# Altium PCB PUMP_MODULE_20230110.PcbDoc (part 4 of 6)
Units mm, origin at the board's own origin, x right, y up, seen from the top; angles counter-clockwise.
Board outline 260.15 x 142.01 mm, 4 copper layers (Top Layer, Mid-Layer 1, Mid-Layer 2, Bottom Layer); 422 components, 240 nets, 1746 pads, 416 vias.
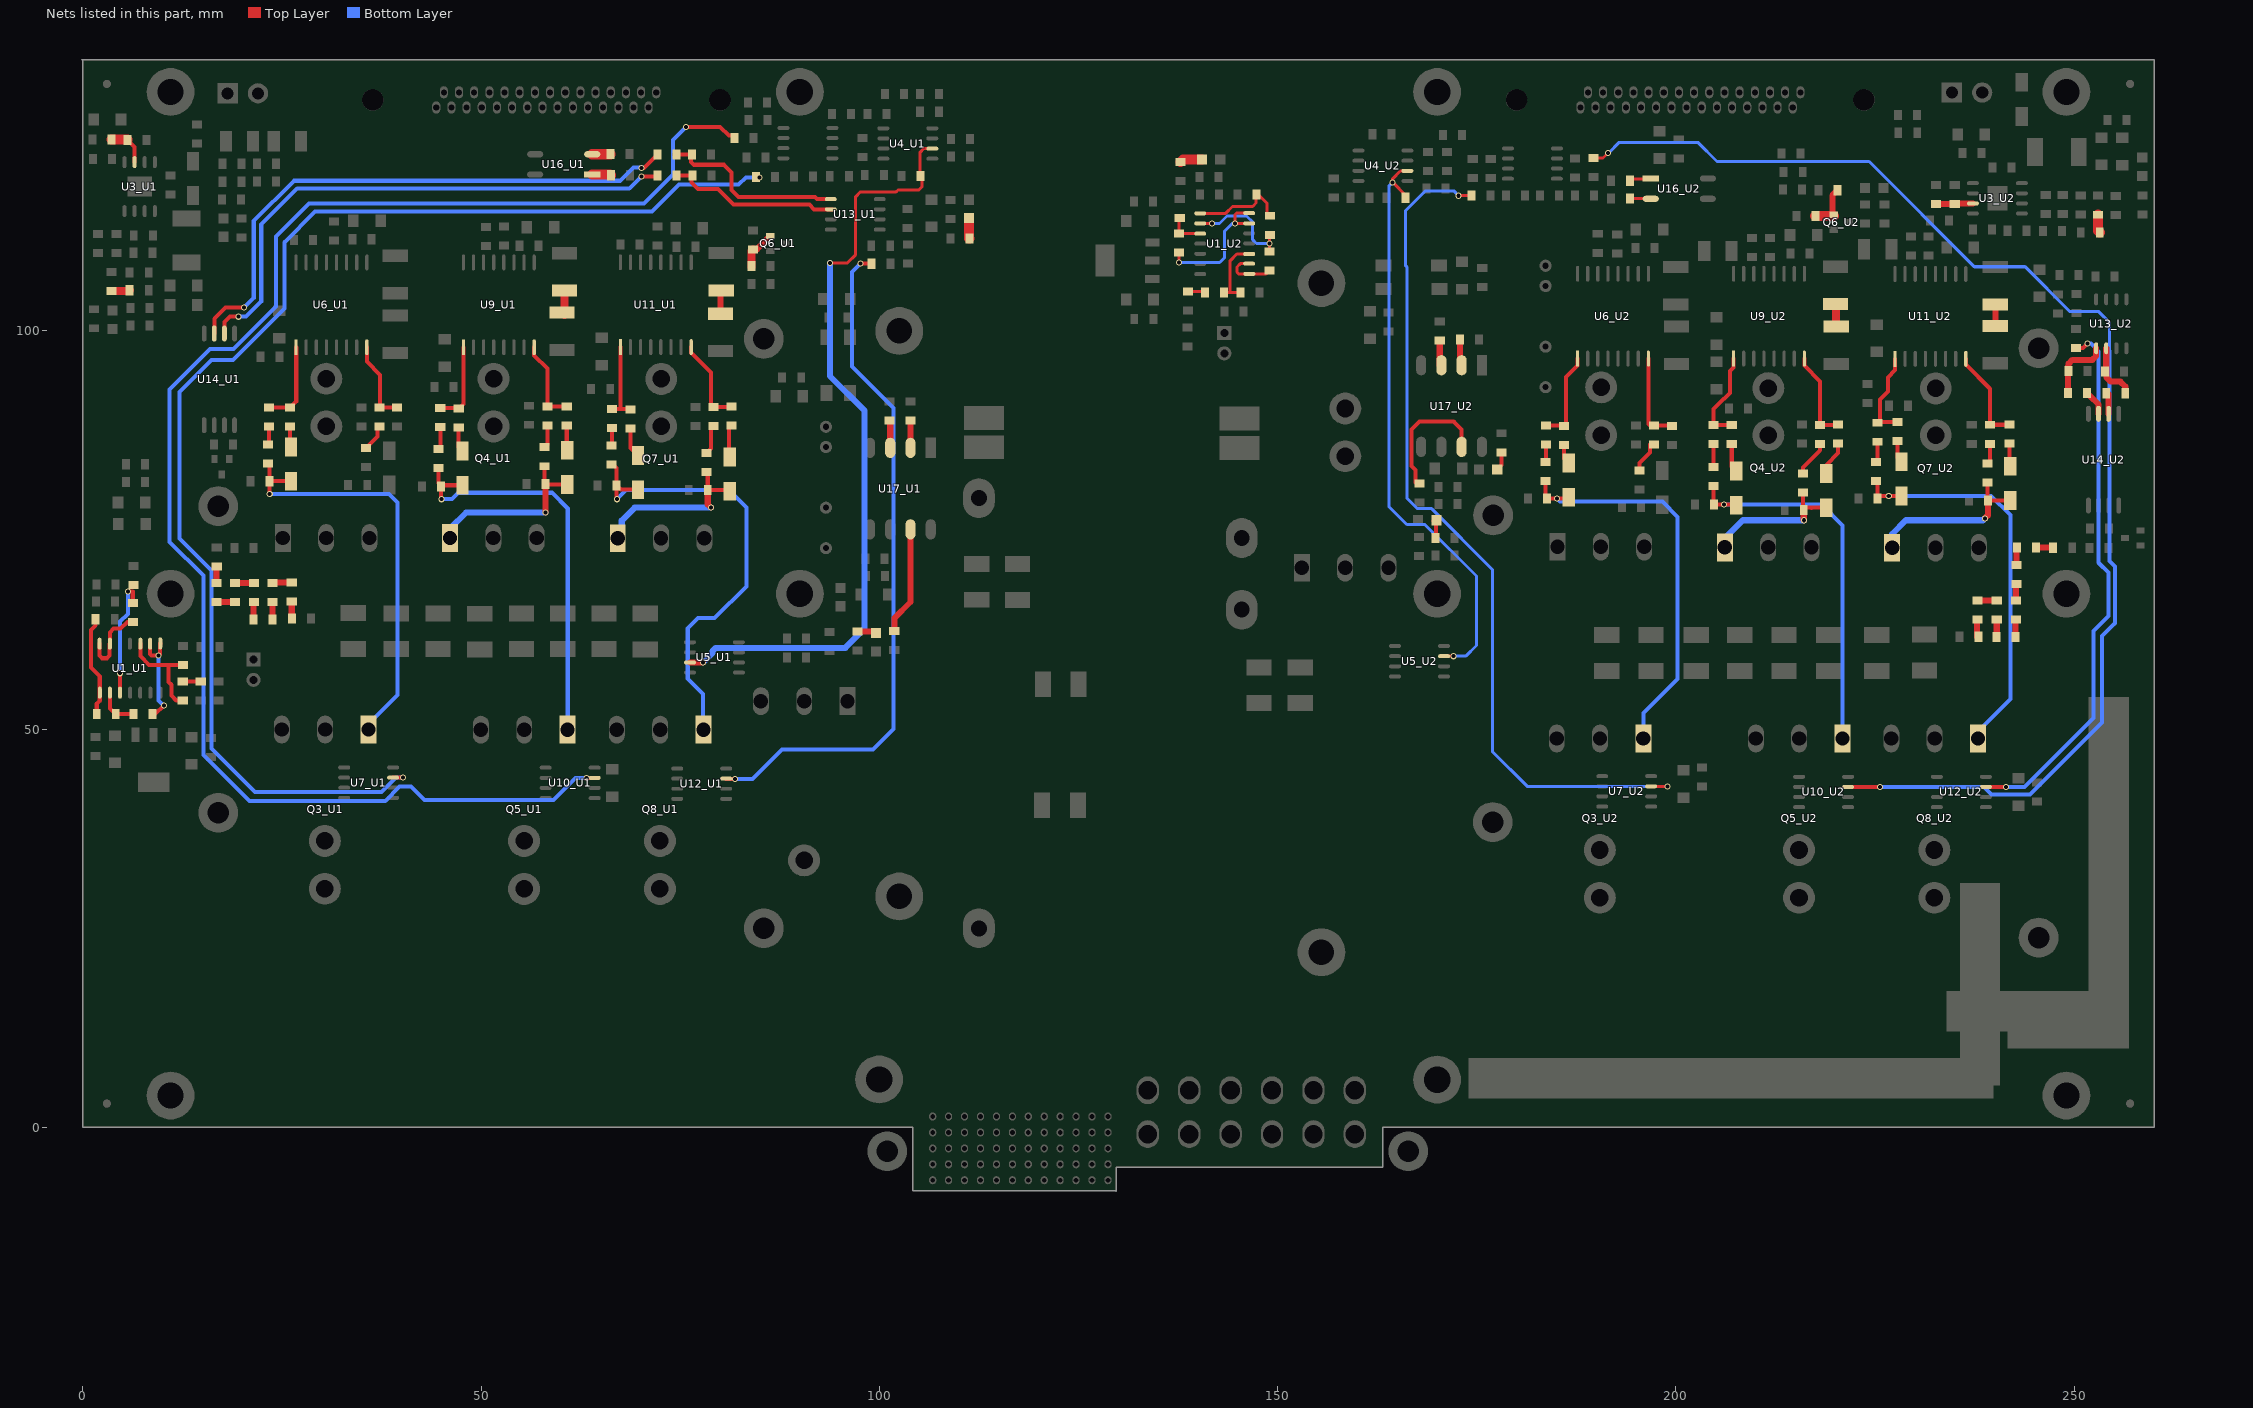
[diagram p6: the nets of this part, all layers, seen from the top]

## Via types
v1: diameter 0.762, hole 0.508, Top Layer to Bottom Layer, 208 vias
v2: diameter 2.032, hole 1.27, Top Layer to Bottom Layer, 78 vias
v3: diameter 1.27, hole 0.762, Top Layer to Bottom Layer, 61 vias
v4: diameter 1.524, hole 1.016, Top Layer to Bottom Layer, 53 vias
v5: diameter 1.27, hole 0.711, Top Layer to Bottom Layer, 16 vias

## Nets (pads, with @x,y where several pads share a name; then routed paths per layer and width w, separated by ;. In a path a pad name is that pad's centre, name@x,y a point inside that pad or via, vN(x,y) a via of type N, cw(c..) or ccw(c..) an arc to the next point about the centre after c; other vN are vias at no path point) (continued)
NetD8_U2_2: D8_U2.2 R34_U2.1 | length 2.4
  Top Layer w0.508: D8_U2.2@177.571,82.601 178.105,83.134 R34_U2.1@178.105,84.76
NetD9_U1_1: D9_U1.1 Q3_U1.1 R36_U1.2 R37_U1.2 | length 53.1
  Top Layer w0.508: R36_U1.2@23.241,83.363 23.444,83.16 R37_U1.2@23.444,81.128 ; v1(23.47,79.502) 23.444,79.527 R37_U1.2@23.444,81.128 ; D9_U1.1@26.137,81.128 R37_U1.2@23.444,81.128
  Bottom Layer w0.508: v1(23.47,79.502) 38.456,79.502 39.497,78.461 39.497,54.28 35.88,50.663 Q3_U1.1@35.88,50
NetD9_U1_2: D9_U1.2 R32_U1.2 | length 2.6
  Top Layer w0.508: R32_U1.2@26.035,87.986 26.035,85.529 D9_U1.2@26.137,85.428
NetD9_U2_1: D9_U2.1 Q3_U2.1 R36_U2.2 R37_U2.2 | length 50.8
  Top Layer w0.508: R36_U2.2@183.617,81.153 183.617,79.121 R37_U2.2@183.794,78.943 v1(185.077,78.943) 186.36,78.943 D9_U2.1@186.538,79.121
  Bottom Layer w0.508: v1(185.077,78.943) 185.458,78.562 198.298,78.562 200.228,76.632 200.228,56.312 195.921,52.005 Q3_U2.1@195.921,48.83
NetD9_U2_2: D9_U2.2 R32_U2.2 | length 2.5
  Top Layer w0.508: R32_U2.2@185.953,85.674 185.953,84.005 D9_U2.2@186.538,83.421
NetD10_U1_1: D10_U1.1 Q4_U1.1 R42_U1.2 R47_U1.2 | length 22.6
  Top Layer w0.508: R42_U1.2@57.963,83.007 57.963,80.899 R47_U1.2@58.064,80.797 58.141,80.721 D10_U1.1@60.833,80.721
  Top Layer w0.762: v1(58.064,77.216) 58.064,78.461 58.09,78.486 58.064,78.511 R47_U1.2@58.064,80.797
  Bottom Layer w0.762: Q4_U1.1@46.12,74 46.12,75.203 48.108,77.191 58.039,77.191 v1(58.064,77.216)
NetD10_U1_2: D10_U1.2 R39_U1.2 | length 3.1
  Top Layer w0.508: R39_U1.2@60.757,88.113 60.757,85.097 D10_U1.2@60.833,85.021
NetD10_U2_1: D10_U2.1 Q4_U2.1 R42_U2.2 R47_U2.2 | length 18.5
  Top Layer w0.508: R42_U2.2@215.951,79.705 215.951,77.622 R47_U2.2@216.052,77.521 216.332,77.8 217.018,77.8 ; 217.041,77.776 217.018,77.8 ; D10_U2.1@218.897,77.8 217.018,77.8
  Top Layer w0.762: R47_U2.2@216.052,77.521 216.052,76.251 v1(216.078,76.225)
  Bottom Layer w0.762: Q4_U2.1@206.146,72.822 206.146,73.965 208.407,76.225 v1(216.078,76.225)
NetD10_U2_2: D10_U2.2 R39_U2.2 | length 4.4
  Top Layer w0.508: D10_U2.2@218.897,82.1 218.897,83.185 220.37,84.658 R39_U2.2@220.37,85.852
NetD11_U1_2: D11_U1.2 D12_U1.1 | length 2.9
  Top Layer w1.016: D12_U1.1@60.477,101.981 D11_U1.2@60.477,104.902
NetD11_U2_2: D11_U2.2 D12_U2.1 | length 2.3
  Top Layer w1.016: D12_U2.1@220.116,100.533 D11_U2.2@220.116,102.819
NetD13_U1_2: D13_U1.2 R46_U1.2 | length 2.4
  Top Layer w0.762: R46_U1.2@97.282,62.255 99.416,62.255 D13_U1.2@99.593,62.078
NetD13_U2_2: D13_U2.2 R46_U2.2 | length 2.4
  Top Layer w0.508: D13_U2.2@169.748,76.124 169.596,76.124 169.875,75.844 R46_U2.2@169.875,73.965
NetD14_U1_1: D14_U1.1 Q5_U1.1 R53_U1.2 R54_U1.2 | length 51.5
  Top Layer w0.508: R53_U1.2@44.679,82.779 44.679,80.874 45.085,80.467 45.237,80.62 D14_U1.1@47.676,80.62 ; R54_U1.2@44.958,80.467 44.958,78.918 v1(45.009,78.867)
  Bottom Layer w0.508: v1(45.009,78.867) 46.33,78.867 47.142,79.68 58.928,79.68 60.884,77.724 60.884,50.004 Q5_U1.1@60.88,50
NetD14_U1_2: D14_U1.2 R49_U1.2 | length 3.1
  Top Layer w0.508: R49_U1.2@47.193,87.859 47.193,85.402 D14_U1.2@47.676,84.92
NetD14_U2_1: D14_U2.1 Q5_U2.1 R53_U2.2 R54_U2.2 | length 47.9
  Top Layer w0.508: R53_U2.2@204.724,80.518 204.724,78.232 R54_U2.2@204.775,78.181 v1(206.045,78.181) 207.493,78.181 D14_U2.1@207.569,78.105
  Bottom Layer w0.508: v1(206.045,78.181) 218.313,78.181 220.921,75.573 Q5_U2.1@220.921,48.83
NetD14_U2_2: D14_U2.2 R49_U2.2 | length 3.6
  Top Layer w0.508: R49_U2.2@207.01,85.801 207.01,82.964 D14_U2.2@207.569,82.405
NetD15_U1_1: D15_U1.1 Q7_U1.1 R61_U1.2 R62_U1.2 | length 21.9
  Top Layer w0.508: R61_U1.2@78.283,82.296 78.461,82.118 R62_U1.2@78.461,80.035 81.026,80.035 D15_U1.1@81.204,79.858
  Top Layer w0.762: R62_U1.2@78.461,80.035 78.461,78.207 78.867,77.8 v1(78.892,77.8)
  Bottom Layer w0.762: Q7_U1.1@67.12,74 67.666,74.546 67.666,76.175 69.291,77.8 v1(78.892,77.8)
NetD15_U1_2: D15_U1.2 R59_U1.2 | length 4
  Top Layer w0.508: R59_U1.2@81.128,88.113 81.128,84.234 D15_U1.2@81.204,84.158
NetD15_U2_1: D15_U2.1 Q7_U2.1 R61_U2.2 R62_U2.2 | length 21.7
  Top Layer w0.508: R61_U2.2@239.116,80.975 239.116,78.689 239.141,78.715 D15_U2.1@241.96,78.715
  Top Layer w0.762: v1(238.785,76.454) 239.166,76.835 R62_U2.2@239.166,78.689
  Bottom Layer w0.762: Q7_U2.1@227.152,72.771 227.152,74.498 228.879,76.225 238.557,76.225 v1(238.785,76.454)
NetD15_U2_2: D15_U2.2 R59_U2.2 | length 2.9
  Top Layer w0.508: R59_U2.2@241.884,85.852 241.884,83.091 D15_U2.2@241.96,83.015
NetD16_U1_2: D16_U1.2 D17_U1.1 | length 2.8
  Top Layer w0.762: D17_U1.1@80.061,102.159 D16_U1.2@80.061,105.004
NetD16_U2_2: D16_U2.2 D17_U2.1 | length 2.7
  Top Layer w0.762: D17_U2.1@240.106,100.635 D16_U2.2@240.106,103.327
NetD18_U1_1: D18_U1.1 Q8_U1.1 R67_U1.2 R68_U1.2 | length 58.1
  Top Layer w0.508: R67_U1.2@66.396,83.236 66.573,83.236 67.031,82.779 R68_U1.2@67.031,80.569 ; v1(67.056,78.867) 67.031,78.892 R68_U1.2@67.031,80.569 ; D18_U1.1@69.698,80.061 67.539,80.061 R68_U1.2@67.031,80.569
  Bottom Layer w0.508: v1(67.056,78.867) 68.199,80.01 81.102,80.01 83.312,77.8 83.312,67.92 79.324,63.932 77.241,63.932 75.946,62.636 75.946,56.363 77.88,54.429 Q8_U1.1@77.88,50
NetD18_U1_2: D18_U1.2 R64_U1.2 | length 3.8
  Top Layer w0.508: R64_U1.2@68.783,87.757 68.783,85.275 D18_U1.2@69.698,84.361
NetD18_U2_1: D18_U2.1 Q8_U2.1 R67_U2.2 R68_U2.2 | length 51.4
  Top Layer w0.508: R67_U2.2@225.12,81.153 225.323,80.95 R68_U2.2@225.323,78.943 225.654,79.273 v1(226.72,79.273) D18_U2.1@228.321,79.273
  Bottom Layer w0.508: v1(226.72,79.273) 239.573,79.273 241.986,76.86 241.986,53.797 237.921,49.733 Q8_U2.1@237.921,48.83
NetD18_U2_2: D18_U2.2 R64_U2.2 | length 2.8
  Top Layer w0.508: R64_U2.2@227.813,86.182 227.813,84.081 D18_U2.2@228.321,83.573
NetD19_U1_2: D19_U1.2 R71_U1.2 | length 2.6
  Top Layer w1.27: D19_U1.2@111.277,114.148 111.277,111.608 R71_U1.2@111.303,111.582
NetD19_U2_2: D19_U2.2 R71_U2.2 | length 2.8
  Top Layer w1.27: R71_U2.2@137.82,121.183 138.151,121.514 D19_U2.2@140.487,121.514
NetQ6_U1_1: Q6_U1.1 R55_U1.1 R58_U1.2 | length 5.1
  Top Layer w0.762: R55_U1.1@84.15,110.236 84.607,110.236 86.081,111.709 Q6_U1.1@86.309,111.709
  Top Layer w1.016: R58_U1.2@83.972,108.001 83.972,110.058 R55_U1.1@84.15,110.236
NetQ6_U2_1: Q6_U2.1 R55_U2.1 R58_U2.2 | length 5.8
  Top Layer w0.762: Q6_U2.1@219.812,114.579 219.634,114.757 219.634,117.018 R55_U2.1@220.269,117.653
  Top Layer w1.27: R58_U2.2@217.449,114.427 R58_U2.2@217.5,114.427 218.948,114.427 Q6_U2.1@219.812,114.427
NetR1_U1_1: R1_U1.1 R5_U1.1 U1_U1.1 | length 12
  Top Layer w0.508: 1.6,63.043 1.016,62.459 1.016,57.734 2.134,56.617 U1_U1.1@2.134,54.585 2.134,53.569 1.753,53.188 R1_U1.1@1.753,51.892
NetR1_U1_2: R1_U1.2 R2_U1.1 U1_U1.2 | length 5.3
  Top Layer w0.508: U1_U1.2@3.404,54.585 3.404,52.578 4.14,51.841 4.191,51.892 R2_U1.1@6.375,51.892
NetR1_U2_1: R1_U2.1 R5_U2.1 U1_U2.1 | length 12.1
  Top Layer w0.381: U1_U2.1@140.284,114.757 143.485,114.757 144.348,115.621 146.863,115.621 147.295,116.053 147.295,117.069 R5_U2.1@147.345,117.119 147.574,117.119 148.641,116.053 148.641,114.859 R1_U2.1@149.047,114.452
NetR1_U2_2: R1_U2.2 R2_U2.1 U1_U2.2 | length 13.9
  Top Layer w0.381: U1_U2.2@140.284,113.487 v1(141.757,113.487) ; R2_U2.1@148.996,109.982 v1(148.996,110.973) 148.996,112.014 R1_U2.2@149.047,112.065
  Bottom Layer w0.381: v1(141.757,113.487) 142.697,113.487 143.637,114.427 146.101,114.427 146.863,113.665 146.863,111.455 147.345,110.973 v1(148.996,110.973)
NetR2_U1_2: R2_U1.2 U1_U1.8 U1_U1.9 | length 12.5
  Top Layer w0.508: U1_U1.9@8.458,60.731 8.458,59.436 8.636,59.258 v1(9.5,59.258) 9.703,59.461 9.703,60.731 U1_U1.8@9.728,60.757 ; R2_U1.2@8.763,51.892 9.093,51.892 v1(10.185,52.984)
  Bottom Layer w0.508: v1(9.5,59.258) 9.5,53.619 v1@10.16,52.959
NetR2_U2_2: R2_U2.2 U1_U2.8 U1_U2.9 | length 6.7
  Top Layer w0.381: U1_U2.9@146.431,108.433 145.313,108.433 144.907,108.026 144.907,107.366 145.161,107.112 146.406,107.112 U1_U2.8@146.456,107.163 148.565,107.163 R2_U2.2@148.996,107.594
NetR3_U1_2: R3_U1.2 R7_U1.1 U1_U1.10 | length 13
  Top Layer w0.508: U1_U1.10@7.239,60.731 7.239,59.157 8.331,58.064 10.77,58.064 ; R7_U1.1@12.548,53.619 11.735,53.619 11.125,54.229 11.125,55.575 10.77,55.931 10.77,58.064 ; R3_U1.2@12.573,58.064 10.77,58.064
NetR3_U2_2: R3_U2.2 R7_U2.1 U1_U2.10 | length 8.8
  Top Layer w0.381: R7_U2.1@143.256,104.8 144.018,104.8 ; R3_U2.2@145.339,104.8 144.018,104.8 ; U1_U2.10@146.431,109.652 144.882,109.652 144.043,108.814 144.043,104.826 144.018,104.8
NetR6_U1_1: R6_U1.1 R12_U1.1 U1_U1.3 | length 15.2
  Top Layer w0.508: U1_U1.3@4.674,54.585 4.674,56.998 v1(4.699,57.023) ; v1(5.664,67.285) 6.274,67.285 6.274,65.913 R6_U1.1@6.325,65.862
  Bottom Layer w0.508: v1(4.699,57.023) 4.699,63.5 5.664,64.465 v1(5.664,67.285)
NetR6_U1_2: R6_U1.2 U1_U1.13 U1_U1.14 | length 9.4
  Top Layer w0.508: U1_U1.14@2.108,60.731 2.108,59.233 2.438,58.903 3.048,58.903 3.378,59.233 3.378,60.706 U1_U1.13@3.404,60.731 3.404,62.154 3.861,62.611 4.75,62.611 5.613,63.475 R6_U1.2@6.325,63.475
NetR6_U2_1: R6_U2.1 R12_U2.1 U1_U2.3 | length 4.7
  Top Layer w0.381: R12_U2.1@137.719,114.173 137.617,114.071 R6_U2.1@137.617,112.217 U1_U2.3@140.284,112.217
NetR6_U2_2: R6_U2.2 U1_U2.13 U1_U2.14 | length 17
  Top Layer w0.381: v1(137.617,108.585) R6_U2.2@137.617,109.83 ; U1_U2.13@146.431,113.487 v1(144.653,113.487) 144.653,114.605 144.831,114.783 U1_U2.14@146.431,114.783
  Bottom Layer w0.381: v1(137.617,108.585) 142.723,108.585 143.358,109.22 143.358,112.547 144.297,113.487 v1(144.653,113.487)
NetR7_U1_2: R7_U1.2 R10_U1.2 | length 2.3
  Top Layer w0.508: R7_U1.2@12.548,56.007 R10_U1.2@14.808,56.007
NetR7_U2_2: R7_U2.2 R10_U2.2 | length 2.2
  Top Layer w0.381: R10_U2.2@138.735,104.927 140.741,104.927 R7_U2.2@140.868,104.8
NetR17_U1_2: R17_U1.2 R24_U1.1 U3_U1.3 | length 5.2
  Top Layer w0.508: R17_U1.2@5.613,123.977 6.502,123.088 U3_U1.3@6.502,121.183
  Top Layer w1.27: R24_U1.1@3.607,124.003 5.588,124.003 R17_U1.2@5.613,123.977
NetR17_U2_2: R17_U2.2 R24_U2.1 U3_U2.3 | length 4.4
  Top Layer w0.762: R24_U2.1@232.664,115.926 234.975,115.926 R17_U2.2@235.001,115.951 ; R17_U2.2@235.255,116.002 U3_U2.3@237.287,116.002
NetR19_U1_2: R19_U1.2 R20_U1.1 | length 2.3
  Top Layer w1.016: R19_U1.2@3.607,105.004 5.791,105.004 R20_U1.1@5.893,105.105
NetR19_U2_2: R19_U2.2 R20_U2.1 | length 2.3
  Top Layer w1.27: R20_U2.1@253.009,114.579 253.009,112.547 R19_U2.2@253.213,112.344
NetR23_U1_1: R23_U1.1 R26_U1.1 U6_U1.8 | length 10
  Top Layer w0.508: U6_U1.8@35.662,97.942 35.662,96.139 37.313,94.488 37.313,90.551 37.465,90.399 R23_U1.1@39.218,90.399
NetR23_U2_1: R23_U2.1 R26_U2.1 U6_U2.8 | length 10.8
  Top Layer w0.508: U6_U2.8@196.545,96.52 196.545,88.29 196.723,88.113 R23_U2.1@199.009,88.113
NetR26_U1_2: R26_U1.2 R27_U1.1 | length 3.3
  Top Layer w0.508: R27_U1.1@35.56,85.293 36.982,86.716 R26_U1.2@36.982,87.986
NetR26_U2_2: R26_U2.2 R27_U2.1 | length 3.8
  Top Layer w0.508: R27_U2.1@195.453,82.474 195.453,83.439 196.723,84.709 R26_U2.2@196.723,85.725
NetR29_U1_2: R29_U1.2 U4_U1.6 U5_U1.7 | length 98
  Top Layer w0.381: v1(93.802,108.534) 95.987,108.534 97.028,109.576 97.028,116.84 97.638,117.45 102.108,117.45 102.337,117.678 ; 102.972,117.678 102.337,117.678 ; R29_U1.2@105.156,119.456 105.131,119.482 105.131,122.428 105.588,122.885 U4_U1.6@106.655,122.885 ; R29_U1.2@105.359,119.507 105.359,118.085 104.953,117.678 102.337,117.678
  Top Layer w0.762: U5_U1.7@76.225,58.369 v1(77.876,58.369)
  Bottom Layer w0.762: v1(77.876,58.369) 79.045,59.538 79.045,59.792 79.451,60.198 95.733,60.198 98.12,62.586 98.12,90.018 93.802,94.336 v1(93.802,108.534)
NetR29_U2_2: R29_U2.2 U4_U2.6 U5_U2.7 | length 74.2
  Top Layer w0.381: R29_U2.2@166.065,116.713 166.141,116.789 166.141,116.942 v1(164.44,118.643) 164.44,119.101 165.43,120.091 U4_U2.6@166.294,120.091 ; U5_U2.7@170.891,59.157 v1(172.06,59.157)
  Bottom Layer w0.381: v1(164.44,118.643) 163.957,118.161 163.957,77.953 166.218,75.692 168.478,75.692 174.955,69.215 174.955,60.503 173.609,59.157 v1(172.06,59.157)
NetR32_U1_1: R32_U1.1 R35_U1.1 U6_U1.1 | length 10.6
  Top Layer w0.508: R35_U1.1@23.368,90.373 R32_U1.1@26.035,90.373 26.797,91.135 26.797,97.917 U6_U1.1@26.772,97.942
NetR32_U2_1: R32_U2.1 R35_U2.1 U6_U2.1 | length 11.3
  Top Layer w0.508: R35_U2.1@183.693,88.138 185.877,88.138 186.207,88.468 186.207,94.209 187.655,95.656 U6_U2.1@187.655,96.52
NetR35_U1_2: R35_U1.2 R36_U1.1 | length 2.3
  Top Layer w0.508: R36_U1.1@23.241,85.75 23.368,85.877 R35_U1.2@23.368,87.986
NetR35_U2_2: R35_U2.2 R36_U2.1 | length 2.2
  Top Layer w0.508: R36_U2.1@183.617,83.541 183.693,83.617 R35_U2.2@183.693,85.75
NetR38_U1_2: R38_U1.2 U17_U1.2 | length 3.4
  Top Layer w0.762: U17_U1.2@103.911,85.319 R38_U1.2@103.911,88.748
NetR38_U2_2: R38_U2.2 U17_U2.2 | length 3.1
  Top Layer w0.762: U17_U2.2@172.898,95.682 172.898,98.755 R38_U2.2@172.923,98.781
NetR39_U1_1: R39_U1.1 R41_U1.1 U9_U1.8 | length 10.5
  Top Layer w0.508: U9_U1.8@56.667,97.942 56.667,96.926 58.318,95.275 R41_U1.1@58.318,90.526 60.731,90.526 R39_U1.1@60.757,90.5
NetR39_U2_1: R39_U2.1 R41_U2.1 U9_U2.8 | length 11.4
  Top Layer w0.508: U9_U2.8@216.129,96.52 216.129,95.631 218.11,93.65 R41_U2.1@218.11,88.189 220.32,88.189 R39_U2.1@220.37,88.24
NetR40_U1_1: R40_U1.1 U17_U1.7 | length 13.6
  Top Layer w0.762: R40_U1.1@101.879,62.332 101.879,63.932 103.911,65.964 U17_U1.7@103.911,75.082
NetR40_U2_1: R40_U2.1 U17_U2.7 | length 16.6
  Top Layer w0.508: R40_U2.1@167.335,80.95 167.335,82.525 166.827,83.033 166.827,87.605 167.818,88.595 172.11,88.595 173.101,87.605 173.101,85.649 172.898,85.446 U17_U2.7@173.177,85.166
NetR41_U1_2: R41_U1.2 R42_U1.1 | length 2.9
  Top Layer w0.508: R42_U1.1@57.963,85.395 58.318,85.75 R41_U1.2@58.318,88.138
NetR41_U2_2: R41_U2.2 R42_U2.1 | length 4.6
  Top Layer w0.508: R42_U2.1@215.951,82.093 215.951,82.855 218.11,85.014 R41_U2.2@218.11,85.801
NetR44_U1_2: R44_U1.2 U7_U1.7 | length 163.6
  Top Layer w0.508: U7_U1.7@38.964,43.917 40.183,43.917 v1(40.208,43.942)
  Bottom Layer w0.508: v1(40.208,43.942) 39.345,43.942 37.49,42.088 21.641,42.088 16.154,47.574 16.154,69.926 12.167,73.914 12.167,92.354 16.18,96.368 18.872,96.368 25.298,102.794 25.298,111.125 29.159,114.986 71.476,114.986 74.854,118.364 82.321,118.364 83.236,119.278 v1(84.963,119.278)
NetR44_U2_2: R44_U2.2 U7_U2.7 | length 108.8
  Top Layer w0.381: v1(172.72,116.967) 172.771,117.018 R44_U2.2@174.32,117.018 ; U7_U2.7@196.901,42.824 v1(198.933,42.824)
  Bottom Layer w0.381: v1(172.72,116.967) 172.11,117.577 168.554,117.577 166.078,115.1 166.078,108.166 166.268,107.975 166.268,78.969 167.564,77.673 169.342,77.673 176.962,70.053 176.962,47.193 181.331,42.824 v1(198.933,42.824)
NetR45_U1_2: R45_U1.2 U17_U1.3 | length 3.5
  Top Layer w0.762: R45_U1.2@101.295,88.773 101.371,88.697 U17_U1.3@101.371,85.319
NetR45_U2_2: R45_U2.2 U17_U2.3 | length 3.1
  Top Layer w0.762: U17_U2.3@170.358,95.682 R45_U2.2@170.358,98.781
NetR49_U1_1: R49_U1.1 R52_U1.1 U9_U1.1 | length 10.3
  Top Layer w0.508: R52_U1.1@44.882,90.297 47.142,90.297 R49_U1.1@47.193,90.246 47.777,90.83 U9_U1.1@47.777,97.942
NetR49_U2_1: R49_U2.1 R52_U2.1 U9_U2.1 | length 12
  Top Layer w0.508: R49_U2.1@207.239,88.417 R49_U2.1@207.01,88.189 R52_U2.1@204.724,88.189 204.724,90.17 206.069,91.515 206.077,91.515 206.781,92.219 206.781,94.971 207.239,95.428 U9_U2.1@207.239,96.52
NetR52_U1_2: R52_U1.2 R53_U1.1 | length 2.8
  Top Layer w0.508: R53_U1.1@44.679,85.166 44.882,85.369 R52_U1.2@44.882,87.909
NetR52_U2_2: R52_U2.2 R53_U2.1 | length 2.9
  Top Layer w0.508: R53_U2.1@204.724,82.906 R52_U2.2@204.724,85.801
NetR57_U1_2: R57_U1.2 U10_U1.7 | length 194.6
  Top Layer w0.508: v1(63.246,43.891) U10_U1.7@64.262,43.891 ; v1(75.717,125.603) 80.01,125.603 81.102,124.511 R57_U1.2@81.915,124.511
  Bottom Layer w0.508: v1(63.246,43.891) 61.874,43.891 59.08,41.097 42.901,41.097 41.224,42.774 39.776,42.774 37.973,40.97 20.904,40.97 15.138,46.736 15.138,69.266 10.897,73.508 10.897,92.659 15.977,97.739 18.923,97.739 24.257,103.073 24.257,111.862 28.372,115.976 70.46,115.976 74.092,119.609 74.092,123.977 v1(75.717,125.603)
NetR57_U2_2: R57_U2.2 U10_U2.7 | length 162.1
  Top Layer w0.381: R57_U2.2@189.636,121.691 190.856,121.691 v1@191.503,122.339
  Top Layer w0.508: U10_U2.7@221.615,42.748 v1(225.628,42.748)
  Bottom Layer w0.381: v1@191.592,122.377 192.888,123.673 202.743,123.673 205.156,121.26 224.257,121.26 237.465,108.052 243.84,108.052 249.479,102.413 253.086,102.413 254.432,101.067 254.432,97.485
  Bottom Layer w0.508: v1(225.628,42.748) 238.658,42.748 239.598,41.808 244.475,41.808 253.517,50.851 253.517,61.697 255.118,63.297 255.118,70.409 254.432,71.095 254.432,97.485
  other v1: 191.465,122.326
NetR59_U1_1: R59_U1.1 R60_U1.1 U11_U1.8 | length 10.8
  Top Layer w0.508: U11_U1.8@76.378,97.968 76.378,97.257 78.842,94.793 78.842,90.449 81.077,90.449 R59_U1.1@81.128,90.5
NetR59_U2_1: R59_U2.1 R60_U2.1 U11_U2.8 | length 12
  Top Layer w0.508: U11_U2.8@236.398,96.495 236.398,95.758 239.42,92.735 R60_U2.1@239.42,88.214 241.859,88.214 R59_U2.1@241.884,88.24
NetR60_U1_2: R60_U1.2 R61_U1.1 | length 3.6
  Top Layer w0.508: R61_U1.1@78.283,84.684 78.842,85.242 R60_U1.2@78.842,88.062
NetR60_U2_2: R60_U2.2 R61_U2.1 | length 2.6
  Top Layer w0.508: R61_U2.1@239.116,83.363 239.42,83.668 R60_U2.2@239.42,85.827
NetR64_U1_1: R64_U1.1 R66_U1.1 U11_U1.1 | length 11.1
  Top Layer w0.508: U11_U1.1@67.488,97.968 67.488,90.297 67.361,90.17 R66_U1.1@66.446,90.17 68.758,90.17 R64_U1.1@68.783,90.145
NetR64_U2_1: R64_U2.1 R66_U2.1 U11_U2.1 | length 11.5
  Top Layer w0.508: U11_U2.1@227.508,96.495 227.508,95.072 226.606,94.17 226.606,92.392 225.603,91.389 225.603,88.773 R66_U2.1@225.298,88.468 225.4,88.57 R64_U2.1@227.813,88.57
NetR66_U1_2: R66_U1.2 R67_U1.1 | length 2.2
  Top Layer w0.508: R67_U1.1@66.396,85.623 66.446,85.674 R66_U1.2@66.446,87.782
NetR66_U2_2: R66_U2.2 R67_U2.1 | length 2.6
  Top Layer w0.508: R67_U2.1@225.12,83.541 225.298,83.718 R66_U2.2@225.298,86.081
NetR70_U1_2: R70_U1.2 U12_U1.7 | length 86
  Top Layer w0.508: U12_U1.7@80.772,43.764 v1(81.89,43.764) v1@81.864,43.79 ; v1@97.612,108.433 R70_U1.2@99.009,108.433
  Bottom Layer w0.508: v1(81.89,43.764) 84.099,43.764 87.782,47.447 99.187,47.447 101.752,50.013 101.752,90.297 96.545,95.504 96.545,107.366 v1@97.612,108.433
  other v1: 97.612,108.458
NetR70_U2_2: R70_U2.2 U12_U2.7 | length 68.1
  Top Layer w0.508: U12_U2.7@238.912,42.748 241.402,42.748 v1(241.427,42.723) ; R70_U2.2@250.241,97.841 251.13,97.841 v1(251.689,98.4) ; R70_U2.2@250.469,97.815 R70_U2.2@250.673,97.815
  Bottom Layer w0.508: v1(241.427,42.723) 243.789,42.723 252.451,51.384 252.451,62.332 254.305,64.186 254.305,69.647 253.06,70.891 253.06,97.434 252.095,98.4 v1(251.689,98.4)
NetR72_U1_1: R72_U1.1 R73_U1.2 U13_U1.5 | length 23.9
  Top Layer w0.508: R73_U1.2@74.295,122.123 76.378,122.123 76.378,121.183 76.708,120.853 80.493,120.853 81.445,119.901 81.445,117.665 82.296,116.815 91.948,116.815 92.202,116.561 U13_U1.5@94.005,116.561
NetR72_U2_1: R72_U2.1 R73_U2.2 U13_U2.5 | length 9.2
  Top Layer w0.762: R73_U2.2@249.225,92.202 249.225,94.513 249.25,94.539 249.25,95.606 ; R72_U2.1@249.301,94.945 249.301,95.885 249.784,96.368 252.273,96.368 252.755,96.85 U13_U2.5@252.755,97.815
NetR73_U1_1: R73_U1.1 U14_U1.7 | length 71.5
  Top Layer w0.508: U14_U1.7@16.51,99.67 16.51,101.524 17.907,102.921 v1(20.244,102.921) ; v1@70.129,120.421 70.46,120.421 R73_U1.1@71.907,121.869
  Bottom Layer w0.508: v1(20.244,102.921) 21.463,104.14 21.463,113.792 26.518,118.847 67.437,118.847 69.113,120.523 v1@70.282,120.523
  other v1: 70.155,120.472
NetR73_U2_1: R73_U2.1 U14_U2.7 | length 3.2
  Top Layer w0.762: R73_U2.1@251.612,92.202 251.993,91.821 253.06,90.754 U14_U2.7@253.06,89.586
NetR74_U1_1: R74_U1.1 R77_U1.2 | length 2.1
  Top Layer w0.762: R74_U1.1@26.238,63.906 R77_U1.2@26.238,66.04
NetR74_U2_1: R74_U2.1 R77_U2.2 | length 2.2
  Top Layer w0.762: R74_U2.1@237.82,61.595 237.82,63.729 R77_U2.2@237.871,63.779
NetR75_U1_1: R75_U1.1 R80_U1.2 | length 2.3
  Top Layer w0.762: R80_U1.2@16.789,65.964 R75_U1.1@19.101,65.964
NetR75_U1_2: R75_U1.2 R76_U1.2 | length 2.4
  Top Layer w0.762: R75_U1.2@19.101,68.351 R76_U1.2@21.488,68.351
NetR75_U2_1: R75_U2.1 R80_U2.2 | length 2.3
  Top Layer w0.762: R75_U2.1@242.773,70.612 242.773,72.669 R80_U2.2@242.951,72.847
NetR75_U2_2: R75_U2.2 R76_U2.2 | length 2.1
  Top Layer w0.762: R76_U2.2@242.697,66.167 242.697,68.148 R75_U2.2@242.773,68.224
NetR76_U1_1: R76_U1.1 R81_U1.2 | length 2.2
  Top Layer w0.762: R81_U1.2@21.412,63.779 21.412,65.888 R76_U1.1@21.488,65.964
NetR76_U2_1: R76_U2.1 R81_U2.2 | length 2.2
  Top Layer w0.762: R81_U2.2@242.646,61.57 242.646,63.729 R76_U2.1@242.697,63.779
NetR77_U1_1: R77_U1.1 R82_U1.2 | length 2.5
  Top Layer w0.762: R82_U1.2@23.8,68.377 23.851,68.428 R77_U1.1@26.238,68.428
NetR77_U2_1: R77_U2.1 R82_U2.2 | length 2.5
  Top Layer w0.762: R77_U2.1@237.871,66.167 R82_U2.2@240.284,66.167 R82_U2.2@240.335,66.116
NetR79_U1_1: R79_U1.1 R80_U1.1 | length 2.1
  Top Layer w0.762: R80_U1.1@16.789,68.351 16.789,70.409 R79_U1.1@16.815,70.434
NetR79_U2_1: R79_U2.1 R80_U2.1 | length 2.2
  Top Layer w0.762: R80_U2.1@245.186,72.796 247.345,72.796 R79_U2.1@247.371,72.771
NetR81_U1_1: R81_U1.1 R82_U1.1 | length 2.2
  Top Layer w0.762: R81_U1.1@23.8,63.779 R82_U1.1@23.8,65.989
NetR81_U2_1: R81_U2.1 R82_U2.1 | length 2.2
  Top Layer w0.762: R81_U2.1@240.259,61.57 240.284,61.595 R82_U2.1@240.284,63.779
NetR83_U1_1: R83_U1.1 R84_U1.2 U13_U1.6 | length 22
  Top Layer w0.508: R84_U1.2@74.32,119.507 76.403,119.507 76.403,118.618 77.216,117.805 79.731,117.805 81.686,115.849 91.237,115.849 91.821,115.265 U13_U1.6@93.904,115.265 U13_U1.6@94.082,115.265
NetR83_U2_1: R83_U2.1 R84_U2.2 U13_U2.6 | length 8.4
  Top Layer w0.762: U13_U2.6@254.025,97.815 254.025,94.615 R83_U2.1@254.063,94.577 ; 254.051,95.656 254.051,94.158 254.584,93.624 255.803,93.624 256.413,93.015 R84_U2.2@256.413,92.177
NetR84_U1_1: R84_U1.1 U14_U1.6 | length 68.9
  Top Layer w0.508: U14_U1.6@17.78,99.67 17.78,101.092 18.466,101.778 v1(19.558,101.778) ; v1(70.129,119.405) 71.831,119.405 R84_U1.1@71.933,119.507
  Bottom Layer w0.508: v1(19.558,101.778) 20.498,101.778 22.403,103.683 22.403,113.36 26.924,117.881 68.605,117.881 v1(70.129,119.405) v1@70.079,119.456
NetR84_U2_1: R84_U2.1 U14_U2.6 | length 2.5
  Top Layer w0.762: U14_U2.6@254.33,89.586 R84_U2.1@254.33,92.1
NetR85_U1_2: R85_U1.2 U16_U1.1 | length 2.4
  Top Layer w1.27: U16_U1.1@63.957,119.634 66.192,119.634 R85_U1.2@66.294,119.532
NetR85_U2_2: R85_U2.2 U16_U2.1 | length 2.3
  Top Layer w0.381: R85_U2.2@194.259,118.415 194.285,118.44 194.285,118.872 194.488,119.075 U16_U2.1@196.012,119.075
NetR86_U1_2: R86_U1.2 U16_U1.3 | length 2.3
  Top Layer w1.27: U16_U1.3@63.957,122.174 66.243,122.174 R86_U1.2@66.269,122.199
NetR86_U2_2: R86_U2.2 U16_U2.3 | length 2.6
  Top Layer w0.381: R86_U2.2@194.259,116.611 196.825,116.611 U16_U2.3@196.85,116.586